# Altium PCB ShiftRegisters.PcbDoc
Units mm, origin at the board's own origin, x right, y up, seen from the top; angles counter-clockwise.
Board outline 264 x 25 mm, 2 copper layers (Top Layer, Bottom Layer); 91 components, 104 nets, 288 pads, 0 vias.
Unrouted connection lines stored in the file: 182.
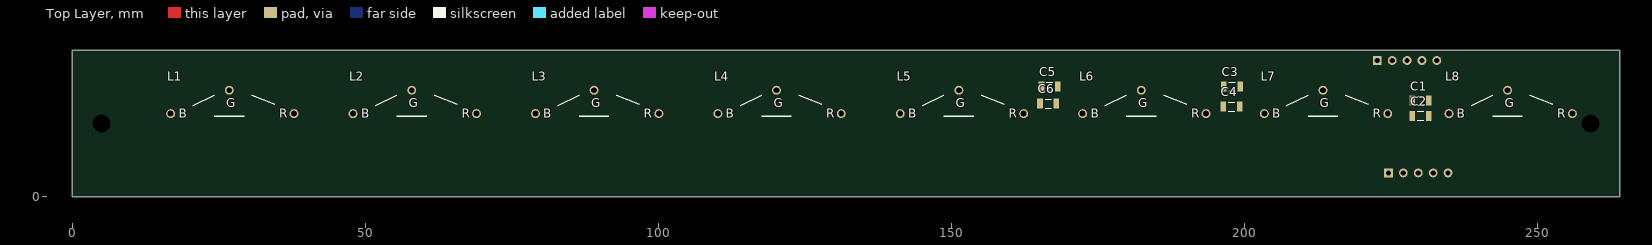
[diagram p0: Top Layer view]
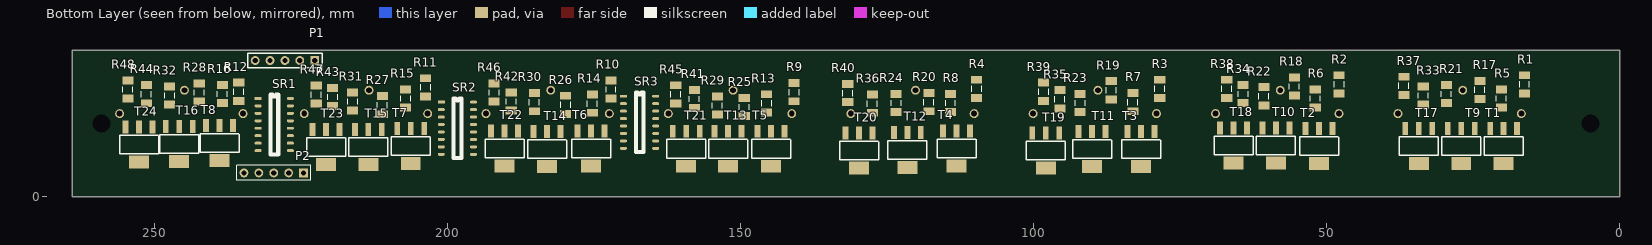
[diagram p1: Bottom Layer view, seen from below]

## Layer stack, top to bottom
Top Solder: solder mask 0.0102, Solder Resist, Dk 3.5
Top Layer: signal copper 0.0356
Dielectric 1: dielectric 0.32, FR-4, Dk 4.8
Bottom Layer: signal copper 0.0356
Bottom Solder: solder mask 0.0102, Solder Resist, Dk 3.5

## Board outline
0,0 264,0 264,25 0,25

## Design rules (kind name [scope] priority, off if disabled: settings)
Clearance [All] p1: gap=0.254 ignorepadtopadclearanceinfootprint=FALSE except(0: Arc-Hole Track-Hole SMDPad-Hole THPad-Hole Via-Hole Fill-Hole Poly-Hole Region-Hole Text-Hole)
PolygonConnect [All] p1: connectstyle=Relief reliefconductorwidth=0.254 reliefentries=4 polygonreliefangle="90 Angle" airgapwidth=0.254
RoutingVias [All] p1: holewidth=0.711 width=1.27 viastyle="Through Hole" minholewidth=0.711 minwidth=1.27 maxholewidth=0.711 maxwidth=1.27
SolderMaskExpansion [All] p1: expansion=0.102
Width [All] p1: maxlimit=0.254 minlimit=0.254 preferedwidth=0.254
30 further rules are at their usual default settings.

## Components (designator, comment, footprint, x,y, rotation, side; value= is the part's Value field where it differs from the comment)
C1 "CAP 100nF 16V 1206(3216)" CAPC1206(3216)190_L 229.997,16.383 r0 top value=1uF
C2 "CAP 100nF 16V 1206(3216)" CAPC1206(3216)190_L 229.997,13.81 r0 top value=100nF
C3 "CAP 100nF 16V 1206(3216)" CAPC1206(3216)190_L 197.866,18.81 r0 top value=1uF
C4 "CAP 100nF 16V 1206(3216)" CAPC1206(3216)190_L 197.739,15.367 r0 top value=100nF
C5 "CAP 100nF 16V 1206(3216)" CAPC1206(3216)190_L 166.751,18.81 r0 top value=1uF
C6 "CAP 100nF 16V 1206(3216)" CAPC1206(3216)190_L 166.497,15.875 r0 top value=100nF
L1 "RGB_LED_Row" LED_ROW 26.797,18.175 r0 top
L2 "RGB_LED_Row" LED_ROW 57.912,18.175 r0 top
L3 "RGB_LED_Row" LED_ROW 89.027,18.175 r0 top
L4 "RGB_LED_Row" LED_ROW 120.142,18.175 r0 top
L5 "RGB_LED_Row" LED_ROW 151.257,18.175 r0 top
L6 "RGB_LED_Row" LED_ROW 182.372,18.175 r0 top
L7 "RGB_LED_Row" LED_ROW 213.36,18.175 r0 top
L8 "RGB_LED_Row" LED_ROW 244.856,18.175 r0 top
P1 "Header_5" PinHeader 222.631,23.241 r0 bottom
P2 "Header 5" HDR1X5 224.536,4.064 r0 bottom
R1 "43k 5% 1206(3216)" RESC1206(3216)_M 16.256,19.177 r270 bottom value="2.00 Ohm"
R2 "43k 5% 1206(3216)" RESC1206(3216)_M 47.879,19.177 r270 bottom value="2.00 Ohm"
R3 "43k 5% 1206(3216)" RESC1206(3216)_M 78.486,18.415 r270 bottom value="2.00 Ohm"
R4 "43k 5% 1206(3216)" RESC1206(3216)_M 109.728,18.415 r270 bottom value="2.00 Ohm"
R5 "2R 5% 1206(3216)" RESC1206(3216)_M 20.193,16.764 r270 bottom value="2.00 Ohm"
R6 "2R 5% 1206(3216)" RESC1206(3216)_M 51.943,16.764 r270 bottom value="2.00 Ohm"
R7 "2R 5% 1206(3216)" RESC1206(3216)_M 83.058,16.129 r270 bottom value="2.00 Ohm"
R8 "2R 5% 1206(3216)" RESC1206(3216)_M 114.173,16.002 r270 bottom value="2.00 Ohm"
R9 "43k 5% 1206(3216)" RESC1206(3216)_M 140.843,17.844 r270 bottom value="2.00 Ohm"
R10 "43k 5% 1206(3216)" RESC1206(3216)_M 172.085,18.288 r270 bottom value="2.00 Ohm"
R11 "43k 5% 1206(3216)" RESC1206(3216)_M 203.708,18.669 r90 bottom value="2.00 Ohm"
R12 "43k 5% 1206(3216)" RESC1206(3216)_M 235.585,17.907 r270 bottom value="2.00 Ohm"
R13 "2R 5% 1206(3216)" RESC1206(3216)_M 145.542,15.939 r270 bottom value="2.00 Ohm"
R14 "2R 5% 1206(3216)" RESC1206(3216)_M 175.26,15.875 r270 bottom value="2.00 Ohm"
R15 "2R 5% 1206(3216)" RESC1206(3216)_M 207.137,16.764 r270 bottom value="2.00 Ohm"
R16 "2R 5% 1206(3216)" RESC1206(3216)_M 238.369,17.526 r270 bottom value="2.00 Ohm"
R17 "43k 5% 1206(3216)" RESC1206(3216)_M 23.876,18.224 r270 bottom value="2.00 Ohm"
R18 "43k 5% 1206(3216)" RESC1206(3216)_M 55.499,18.796 r270 bottom value="2.00 Ohm"
R19 "43k 5% 1206(3216)" RESC1206(3216)_M 86.741,18.161 r270 bottom value="2.00 Ohm"
R20 "43k 5% 1206(3216)" RESC1206(3216)_M 117.856,16.129 r270 bottom value="2.00 Ohm"
R21 "2R 5% 1206(3216)" RESC1206(3216)_M 29.591,17.526 r270 bottom value="2.00 Ohm"
R22 "2R 5% 1206(3216)" RESC1206(3216)_M 60.706,17.145 r270 bottom value="2.00 Ohm"
R23 "2R 5% 1206(3216)" RESC1206(3216)_M 92.075,16.002 r90 bottom value="2.00 Ohm"
R24 "2R 5% 1206(3216)" RESC1206(3216)_M 123.444,16.002 r270 bottom value="2.00 Ohm"
R25 "43k 5% 1206(3216)" RESC1206(3216)_M 149.352,15.304 r270 bottom value="2.00 Ohm"
R26 "43k 5% 1206(3216)" RESC1206(3216)_M 179.832,15.685 r270 bottom value="2.00 Ohm"
R27 "43k 5% 1206(3216)" RESC1206(3216)_M 211.074,15.621 r270 bottom value="2.00 Ohm"
R28 "43k 5% 1206(3216)" RESC1206(3216)_M 242.316,17.78 r270 bottom value="2.00 Ohm"
R29 "2R 5% 1206(3216)" RESC1206(3216)_M 153.924,15.558 r270 bottom value="2.00 Ohm"
R30 "2R 5% 1206(3216)" RESC1206(3216)_M 185.166,16.129 r270 bottom value="2.00 Ohm"
R31 "2R 5% 1206(3216)" RESC1206(3216)_M 216.154,16.256 r270 bottom value="2.00 Ohm"
R32 "2R 5% 1206(3216)" RESC1206(3216)_M 247.396,17.272 r270 bottom value="2.00 Ohm"
R33 "43k 5% 1206(3216)" RESC1206(3216)_M 33.528,17.272 r270 bottom value="2.00 Ohm"
R34 "43k 5% 1206(3216)" RESC1206(3216)_M 64.262,17.526 r270 bottom value="2.00 Ohm"
R35 "43k 5% 1206(3216)" RESC1206(3216)_M 95.504,16.637 r270 bottom value="2.00 Ohm"
R36 "43k 5% 1206(3216)" RESC1206(3216)_M 127.508,15.875 r270 bottom value="2.00 Ohm"
R37 "2R 5% 1206(3216)" RESC1206(3216)_M 36.83,18.923 r270 bottom value="2.00 Ohm"
R38 "2R 5% 1206(3216)" RESC1206(3216)_M 67.056,18.415 r270 bottom value="2.00 Ohm"
R39 "2R 5% 1206(3216)" RESC1206(3216)_M 98.298,17.907 r270 bottom value="2.00 Ohm"
R40 "2R 5% 1206(3216)" RESC1206(3216)_M 131.699,17.679 r270 bottom value="2.00 Ohm"
R41 "43k 5% 1206(3216)" RESC1206(3216)_M 157.861,16.664 r270 bottom value="2.00 Ohm"
R42 "43k 5% 1206(3216)" RESC1206(3216)_M 189.103,16.256 r270 bottom value="2.00 Ohm"
R43 "43k 5% 1206(3216)" RESC1206(3216)_M 219.583,17.018 r270 bottom value="2.00 Ohm"
R44 "43k 5% 1206(3216)" RESC1206(3216)_M 251.333,17.5 r270 bottom value="2.00 Ohm"
R45 "2R 5% 1206(3216)" RESC1206(3216)_M 161.036,17.463 r270 bottom value="2.00 Ohm"
R46 "2R 5% 1206(3216)" RESC1206(3216)_M 192.024,17.78 r270 bottom value="2.00 Ohm"
R47 "2R 5% 1206(3216)" RESC1206(3216)_M 222.377,17.425 r270 bottom value="2.00 Ohm"
R48 "2R 5% 1206(3216)" RESC1206(3216)_M 254.508,18.288 r270 bottom value="2.00 Ohm"
SR1 "Blue" SOP16 232.033,16.764 r180 bottom
SR2 "Green" SOP16 200.791,16.129 r180 bottom
SR3 "Red" SOP16 169.715,17.145 r180 bottom
T1 "PNP-Transistor" SOT-223 19.812,8.636 r0 bottom
T2 "PNP-Transistor" SOT-223 51.308,8.636 r0 bottom
T3 "PNP-Transistor" SOT-223 81.661,8.128 r0 bottom
T4 "PNP-Transistor" SOT-223 113.157,8.255 r0 bottom
T5 "PNP-Transistor" SOT-223 144.78,8.192 r0 bottom
T6 "PNP-Transistor" SOT-223 175.514,8.255 r0 bottom
T7 "PNP-Transistor" SOT-223 206.248,8.636 r0 bottom
T8 "PNP-Transistor" SOT-223 238.887,9.144 r0 bottom
T9 "PNP-Transistor" SOT-223 27.051,8.636 r0 bottom
T10 "PNP-Transistor" SOT-223 58.674,8.763 r0 bottom
T11 "PNP-Transistor" SOT-223 90.043,8.128 r0 bottom
T12 "PNP-Transistor" SOT-223 121.539,8.001 r0 bottom
T13 "PNP-Transistor" SOT-223 152.146,8.192 r0 bottom
T14 "PNP-Transistor" SOT-223 183.007,8.128 r0 bottom
T15 "PNP-Transistor" SOT-223 213.487,8.509 r0 bottom
T16 "PNP-Transistor" SOT-223 245.745,9.017 r0 bottom
T17 "PNP-Transistor" SOT-223 34.29,8.636 r0 bottom
T18 "PNP-Transistor" SOT-223 65.913,8.763 r0 bottom
T19 "PNP-Transistor" SOT-223 97.917,7.874 r0 bottom
T20 "PNP-Transistor" SOT-223 129.794,7.874 r0 bottom
T21 "PNP-Transistor" SOT-223 159.258,8.192 r0 bottom
T22 "PNP-Transistor" SOT-223 190.246,8.255 r0 bottom
T23 "PNP-Transistor" SOT-223 220.726,8.509 r0 bottom
T24 "PNP-Transistor" SOT-223 252.603,8.89 r0 bottom

## Footprints (in the part's own frame and the unit in brackets; to place one, negate y for a bottom-side part, rotate by r counter-clockwise, add the part's x,y. Pads: shape width x height; smd on the part's side, far side on the other; paste and mask are expansions set on the pad)
CAPC1206(3216)190_L [mm] "Chip Capacitor, Body 3.2x1.6mm, Height 1.9mm, IPC High Density"
  rect 0.95x1.7 smd: 1(-1.4,0) 2(1.4,0)
  silkscreen extent -0.55,-0.75 0.55,0.75, body extent -1.7,-0.9 1.7,0.9, height 1.9
HDR1X5 [mm] "Connector; Header; 5 Position"
  rect 1.5x1.5 hole 0.9: 1(0,0)
  round 1.5 hole 0.9: 2(2.54,0) 3(5.08,0) 4(7.62,0) 5(10.16,0)
  silkscreen extent -1.27,-1.27 11.43,1.27
LED_ROW [mil]
  round 60 hole 39.37: 1(435,-157.48) 2(0,0) 3(-393.7,-157.48)
  silkscreen extent -245,-175 305,-35
PinHeader [mm] "Reichelt: RND 205-00675"
  rect 1.5x1.5 hole 0.9: 1(0,0)
  round 1.5 hole 0.9: 2(2.54,0) 3(5.08,0) 4(7.62,0) 5(10.16,0)
  silkscreen extent -1.27,-1.27 11.43,1.27, body extent -1.35,-3.18 11.51,3.22, height 11.5
RESC1206(3216)_M [mm] "Chip Resistor, Body 3.2x1.6mm, IPC Low Density"
  rect 1.35x1.9 smd: 1(-1.55,0) 2(1.55,0)
  silkscreen extent -0.5,-0.85 0.5,0.85, body extent -1.67,-0.87 1.67,0.87, height 0.75
SOP16 [mm]
  rect 1.2x0.5 smd: 1(-0.25,0)
  oval 1.2x0.5 smd: 2(-0.25,-1.27) 3(-0.25,-2.54) 4(-0.25,-3.81) 5(-0.25,-5.08) 6(-0.25,-6.35) 7(-0.25,-7.62) 8(-0.25,-8.89) 9(5.25,-8.89) 10(5.25,-7.62) 11(5.25,-6.35) 12(5.25,-5.08) 13(5.25,-3.81) 14(5.25,-2.54) 15(5.25,-1.27) 16(5.25,0)
  silkscreen extent 1.86,-9.53 3.17,0.63, body extent -3.43,-9.39 5.56,0.51, height 1.48
SOT-223 [mm] "BCP 51-16 NXP"
  rect 1x2.2 smd: 1(-2.3,-2.984) 2(0,-2.984) 3(2.3,-2.984)
  rect 3.4x2.2 smd: 2(0,2.984)
  silkscreen extent -3.35,-1.59 3.3,1.59, body extent -3.3,-3.32 3.2,3.57, height 1.7

## Part data
C1 C2 C3 C4 C5 C6: library part CMP-1037-04176-1, "CAP 100nF 16V ±1% 1206 (3216 Metric) Thickness 1.9mm SMD", Case-EIA=1206, Case-Metric=3216, Rated Voltage="16 V", Tolerance=±1%, Max Thickness="1.9 mm", Technology=SMT
P2: "Header, 5-Pin", LatestRevisionDate=17-Jul-2002, LatestRevisionNote="Re-released for DXP Platform.", Publisher="Altium Limited"
R1 R2 R3 R4 R9 R10 R11 R12 R17 R18 R19 R20 R25 R26 R27 R28 R33 R34 R35 R36 R41 R42 R43 R44: library part CMP-1014-00009-1, "43k 0.25W 5% 1206 (3216 Metric)  SMD", Case-EIA=1206, Case-Metric=3216, Power="0.25 W", Tolerance="5 %", Technology=SMT
R5 R6 R7 R8 R13 R14 R15 R16 R21 R22 R23 R24 R29 R30 R31 R32 R37 R38 R39 R40 R45 R46 R47 R48: library part CMP-1014-00009-1, "2R 0.25W 5% 1206 (3216 Metric)  SMD", Case-EIA=1206, Case-Metric=3216, Power="0.25 W", Tolerance="5 %", Technology=SMT
SR1 SR2 SR3: library part 74HC595, "74HC595 Farnell:  2098004"
T1 T2 T3 T4 T5 T6 T7 T8 T9 T10 T11 T12 T13 T14 T15 T16 T17 T18 T19 T20 T21 T22 T23 T24: "Reichelt: BCP 51-16 NXP"

## Free pads (board coordinates)
  round 1.524 hole 3: 1(5,12.5) 1(259,12.5)

## Nets (pads, with @x,y where several pads share a name; then routed paths per layer and width w, separated by ;. In a path a pad name is that pad's centre, name@x,y a point inside that pad or via, vN(x,y) a via of type N, cw(c..) or ccw(c..) an arc to the next point about the centre after c; other vN are vias at no path point)
5V: C1.1 C2.1 C3.1 C4.1 C5.1 C6.1 P1.1 P2.1 SR1.10 SR1.16 SR2.10 SR2.16 SR3.10 SR3.16 T1.2 T2.2 T3.2 T4.2 T5.2 T6.2 T7.2 T8.2 T9.2 T10.2 T11.2 T12.2 T13.2 T14.2 T15.2 T16.2 T17.2 T18.2 T19.2 T20.2 T21.2 T22.2 T23.2 T24.2
B_0: L1.3 R5.1
B_1: L2.3 R6.1
B_2: L3.3 R7.1
B_3: L4.3 R8.1
B_4: L5.3 R13.1
B_5: L6.3 R14.1
B_6: L7.3 R15.1
B_7: L8.3 R16.1
B_Q0: R1.1 SR1.15
B_Q1: R2.1 SR1.1
B_Q2: R3.1 SR1.2
B_Q3: R4.1 SR1.3
B_Q4: R9.1 SR1.4
B_Q5: R10.1 SR1.5
B_Q6: R11.1 SR1.6
B_Q7: R12.1 SR1.7
G_0: L1.2 R21.1
G_1: L2.2 R22.1
G_2: L3.2 R23.1
G_3: L4.2 R24.1
G_4: L5.2 R29.1
G_5: L6.2 R30.1
G_6: L7.2 R31.1
G_7: L8.2 R32.1
G_Q0: R17.1 SR2.15
G_Q1: R18.1 SR2.1
G_Q2: R19.1 SR2.2
G_Q3: R20.1 SR2.3
G_Q4: R25.1 SR2.4
G_Q5: R26.1 SR2.5
G_Q6: R27.1 SR2.6
G_Q7: R28.1 SR2.7
GND: C1.2 C2.2 C3.2 C4.2 C5.2 C6.2 P1.5 P2.5 SR1.8 SR1.13 SR2.8 SR2.13 SR3.8 SR3.13
NetR1_2: R1.2 T1.1
NetR2_2: R2.2 T2.1
NetR3_2: R3.2 T3.1
NetR4_2: R4.2 T4.1
NetR5_2: R5.2 T1.3
NetR6_2: R6.2 T2.3
NetR7_2: R7.2 T3.3
NetR8_2: R8.2 T4.3
NetR9_2: R9.2 T5.1
NetR10_2: R10.2 T6.1
NetR11_2: R11.2 T7.1
NetR12_2: R12.2 T8.1
NetR13_2: R13.2 T5.3
NetR14_2: R14.2 T6.3
NetR15_2: R15.2 T7.3
NetR16_2: R16.2 T8.3
NetR17_2: R17.2 T9.1
NetR18_2: R18.2 T10.1
NetR19_2: R19.2 T11.1
NetR20_2: R20.2 T12.1
NetR21_2: R21.2 T9.3
NetR22_2: R22.2 T10.3
NetR23_2: R23.2 T11.3
NetR24_2: R24.2 T12.3
NetR25_2: R25.2 T13.1
NetR26_2: R26.2 T14.1
NetR27_2: R27.2 T15.1
NetR28_2: R28.2 T16.1
NetR29_2: R29.2 T13.3
NetR30_2: R30.2 T14.3
NetR31_2: R31.2 T15.3
NetR32_2: R32.2 T16.3
NetR33_2: R33.2 T17.1
NetR34_2: R34.2 T18.1
NetR35_2: R35.2 T19.1
NetR36_2: R36.2 T20.1
NetR37_2: R37.2 T17.3
NetR38_2: R38.2 T18.3
NetR39_2: R39.2 T19.3
NetR40_2: R40.2 T20.3
NetR41_2: R41.2 T21.1
NetR42_2: R42.2 T22.1
NetR43_2: R43.2 T23.1
NetR44_2: R44.2 T24.1
NetR45_2: R45.2 T21.3
NetR46_2: R46.2 T22.3
NetR47_2: R47.2 T23.3
NetR48_2: R48.2 T24.3
NetSR1_9: SR1.9 SR2.14
NetSR2_9: SR2.9 SR3.14
R_0: L1.1 R37.1
R_1: L2.1 R38.1
R_2: L3.1 R39.1
R_3: L4.1 R40.1
R_4: L5.1 R45.1
R_5: L6.1 R46.1
R_6: L7.1 R47.1
R_7: L8.1 R48.1
R_Q0: R33.1 SR3.15
R_Q1: R34.1 SR3.1
R_Q2: R35.1 SR3.2
R_Q3: R36.1 SR3.3
R_Q4: R41.1 SR3.4
R_Q5: R42.1 SR3.5
R_Q6: R43.1 SR3.6
R_Q7: R44.1 SR3.7
SerialIn: P1.4 SR1.14
SerialOut: P2.4 SR3.9
SHCP: P1.3 P2.3 SR1.11 SR2.11 SR3.11
STP: P1.2 P2.2 SR1.12 SR2.12 SR3.12

## Text inside footprints (layer, text, board x,y; h text height)
L1: Top Overlay "B" at 18.161,13.476 h1.52; Top Overlay "G" at 26.289,15.254 h1.52; Top Overlay "R" at 35.306,13.476 h1.52
L2: Top Overlay "R" at 66.421,13.476 h1.52; Top Overlay "G" at 57.404,15.254 h1.52; Top Overlay "B" at 49.276,13.476 h1.52
L3: Top Overlay "B" at 80.391,13.476 h1.52; Top Overlay "G" at 88.519,15.254 h1.52; Top Overlay "R" at 97.536,13.476 h1.52
L4: Top Overlay "R" at 128.651,13.476 h1.52; Top Overlay "G" at 119.634,15.254 h1.52; Top Overlay "B" at 111.506,13.476 h1.52
L5: Top Overlay "B" at 142.621,13.476 h1.52; Top Overlay "G" at 150.749,15.254 h1.52; Top Overlay "R" at 159.766,13.476 h1.52
L6: Top Overlay "R" at 190.881,13.476 h1.52; Top Overlay "G" at 181.864,15.254 h1.52; Top Overlay "B" at 173.736,13.476 h1.52
L7: Top Overlay "B" at 204.724,13.476 h1.52; Top Overlay "G" at 212.852,15.254 h1.52; Top Overlay "R" at 221.869,13.476 h1.52
L8: Top Overlay "R" at 253.365,13.476 h1.52; Top Overlay "G" at 244.348,15.254 h1.52; Top Overlay "B" at 236.22,13.476 h1.52